# Altium PCB AccelPCB.PcbDoc
Units mil, origin at the board's own origin, x right, y up, seen from the top; angles counter-clockwise.
Board outline 1015.28 x 1540.68 mil, 2 copper layers (Top Layer, Bottom Layer), stack 62.8 mil thick; 7 components, 8 nets, 34 pads, 0 vias.
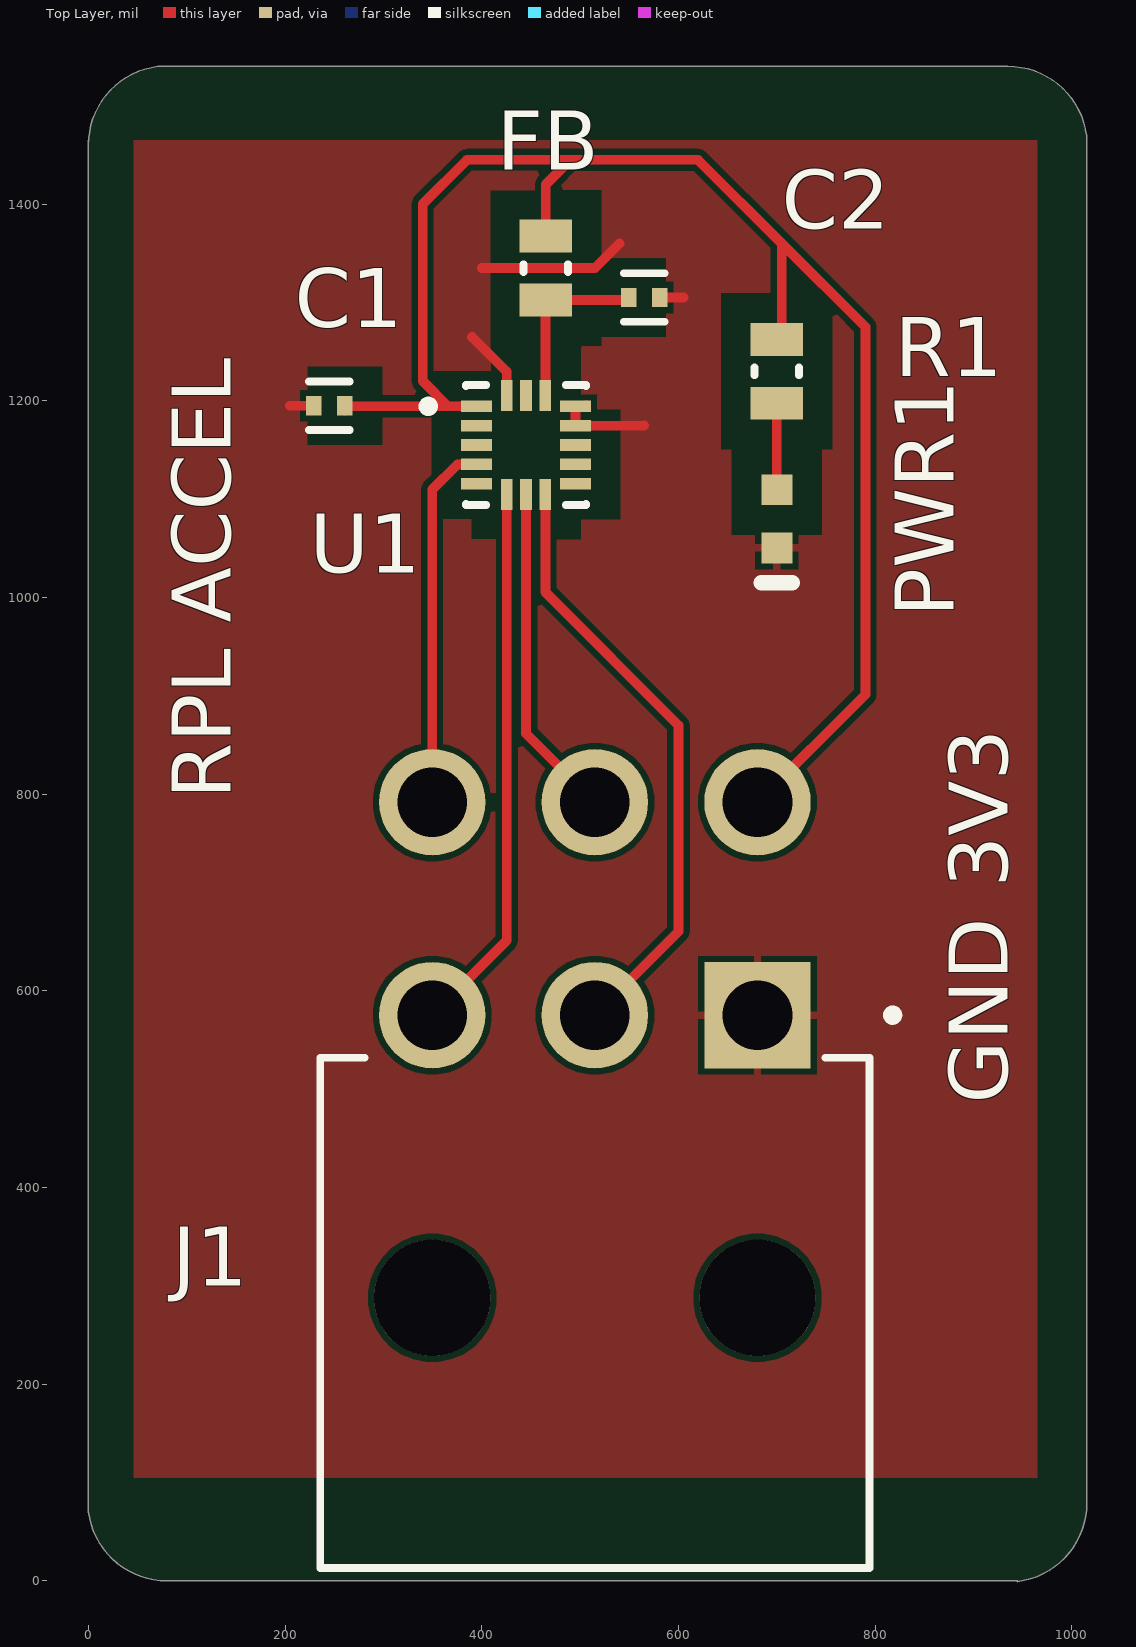
[diagram p0: Top Layer view]
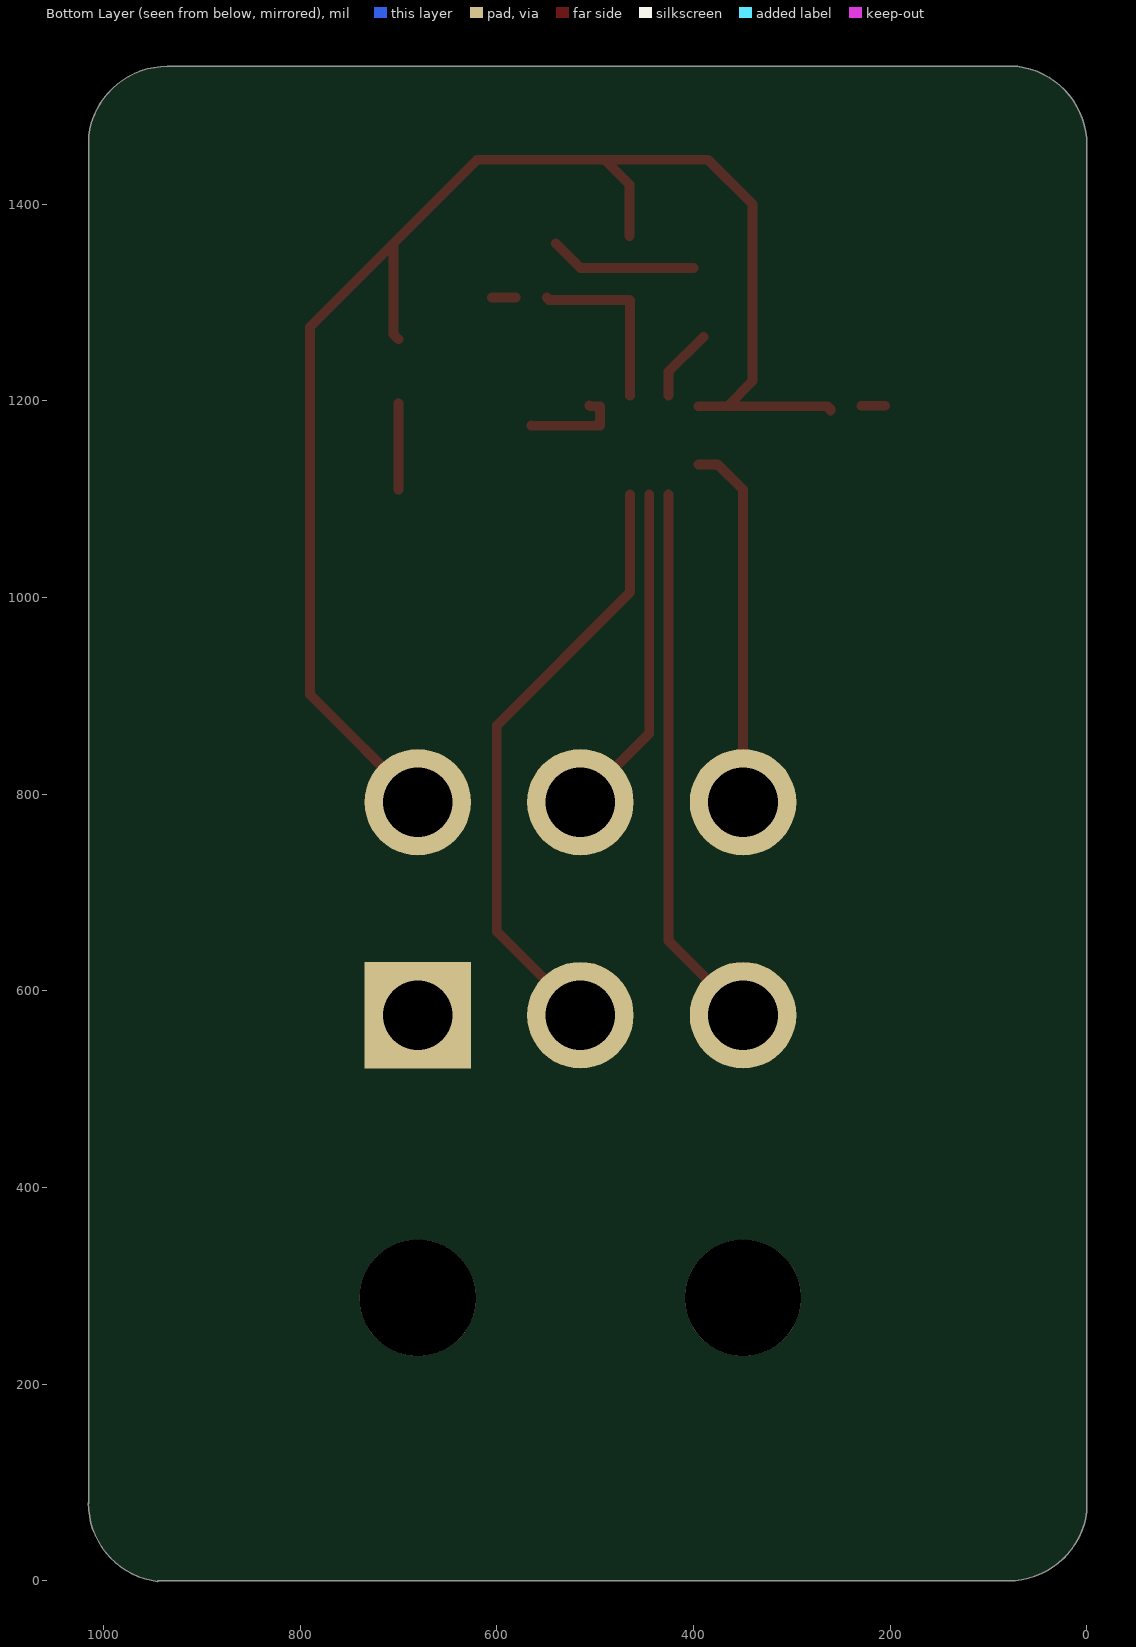
[diagram p1: Bottom Layer view, seen from below]
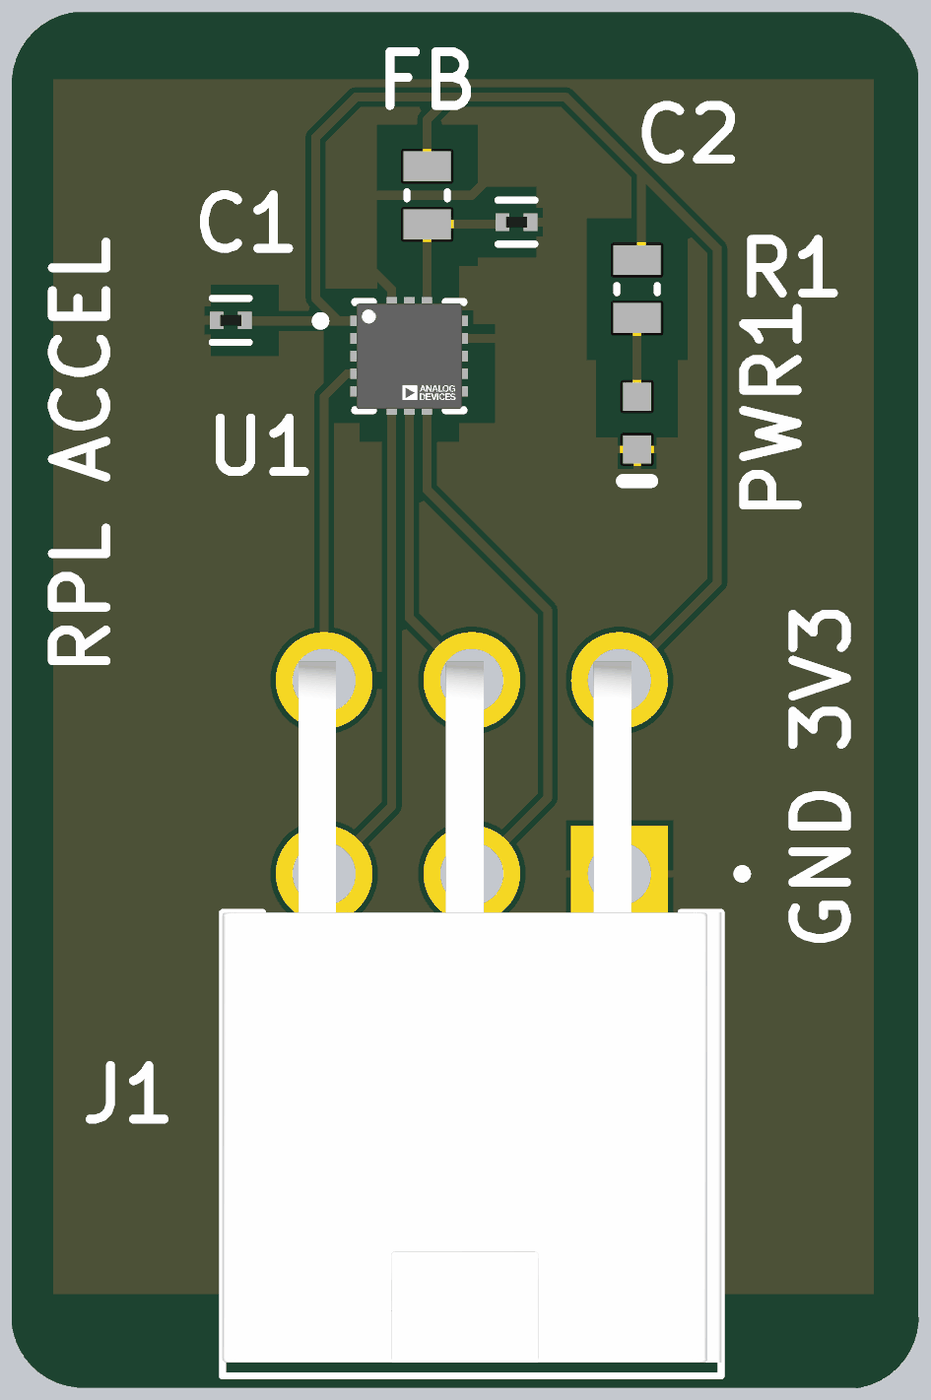
[diagram p2: 3D render of the assembled board from above, using the file's embedded part models]

## Layer stack, top to bottom
Top Solder: solder mask 1, Solder Resist, Dk 3.5
Top Layer: signal copper 1.4
Dielectric 1: dielectric 60, FR-4, Dk 4.5
Bottom Layer: signal copper 1.4
Bottom Solder: solder mask 1, Solder Resist, Dk 3.5

## Board outline
0,70.62 0,1465 0,1460 cw(c80.62,1460) 70.62,1540 935,1540 cw(c935,1459.38) 1015,1469.38 1015,1470 1015,78.69 1015.28,79.32 cw(c934.65,79.32) 944.65,-0.68 945,0 80,0 cw(c80,80.62)

## Design rules (kind name [scope] priority, off if disabled: settings)
BoardOutlineClearance [All] p1: gap=15 ignorepadtopadclearanceinfootprint=FALSE
Clearance [All] p1: gap=6 ignorepadtopadclearanceinfootprint=FALSE except(0: Arc-Hole Track-Hole SMDPad-Hole THPad-Hole Via-Hole Fill-Hole Poly-Hole Region-Hole Text-Hole; 30: SMDPad-Fill SMDPad-Poly SMDPad-Region)
DiffPairsRouting [All] p1: maxlimit=393.7 minlimit=6 mostfreqgap=8 toplayer_minwidth=6 toplayer_maxwidth=15 toplayer_prefwidth=8 bottomlayer_minwidth=6 bottomlayer_maxwidth=15 bottomlayer_prefwidth=8 maxuncoupledlength=500
HoleSize [All] p1: absolutevalues=TRUE maxlimit=250 minlimit=10 maxpercent=80.000 minpercent=20.000
HoleToHoleClearance [All] p1: gap=10 allowstackedmicrovias=FALSE
MinimumAnnularRing [All] p1: minimumring=5
MinimumSolderMaskSliver [All] p1: minsoldermaskwidth=4
PlaneClearance [All] p1: clearance=10
PlaneConnect [All] p1: planeconnectstyle=Direct reliefexpansion=16 reliefentries=4 reliefconductorwidth=6 reliefairgap=6
PolygonConnect [All] p1: connectstyle=Relief reliefconductorwidth=8 reliefentries=4 polygonreliefangle="90 Angle" airgapwidth=6
RoutingCorners [All] p1: cornerstyle=45-Degree minsetback=49.21 maxsetback=49.21
RoutingVias [All] p1: holewidth=12 width=22 viastyle="Through Hole" minholewidth=10 minwidth=20 maxholewidth=250 maxwidth=260
SilkToSilkClearance [All] p1: silktosilkclearance=0
SilkToSolderMaskClearance [IsPad] p1: minsilkscreentomaskgap=2 clearancetoexposedcopper=FALSE
SolderMaskExpansion [All] p1: expansion=2.95 istentingtop=FALSE
Width [All] p1: maxlimit=400 minlimit=6 preferedwidth=8
21 further rules are at their usual default settings.

## Components (designator, comment, footprint, x,y, rotation, side; value= is the part's Value field where it differs from the comment)
C1 "0.1uF 0402" FP-GRM15-MFG 245,1195 r0 top value=0.10μF
C2 "0.1uF 0402" FP-GRM15-MFG 565,1305 r180 top value=0.10μF
FB "100R 0805" RESC2013X50X30LL20T20 465,1335 r90 top
J1 "39-30-0060" FP-39-30-0060-MFG 515,280 r0 top
PWR1 "LTST-S270KGKT" AVAG-HSMX-C190_V 700,1080 r270 top
R1 "75R 0805" RESC2013X50X30LL20T20 700,1230 r270 top
U1 "ADXL373" FP-CC-16-3-MFG 445,1155 r0 top

## Footprints (in the part's own frame and the unit in brackets; to place one, negate y for a bottom-side part, rotate by r counter-clockwise, add the part's x,y. Pads: shape width x height; smd on the part's side, far side on the other; paste and mask are expansions set on the pad)
AVAG-HSMX-C190_V [mm] "SMD, 2-Leads, Body 1.6x0.8mm, Height 0.9mm"
  rect 0.8x0.8 smd: 1(-0.75,0) 2(0.75,0)
  silkscreen extent 1.65,-0.4 1.65,0.4, body extent -0.8,-0.4 0.8,0.4, height 0.9
FP-39-30-0060-MFG [mm]
  rect 2.75x2.75 hole 1.8 paste-1000 mask+0: 1(4.2,7.5)
  round 2.75 hole 1.8 paste-1000 mask+0: 2(0,7.5) 3(-4.2,7.5) 4(4.2,13) 5(0,13) 6(-4.2,13)
  round 3 hole 3 unplated paste-1000 mask+0: ""(-4.2,0.2) ""(4.2,0.2)
  silkscreen extent -7.09,-6.78 7.82,7.62, body extent -7.19,-6.88 7.19,14.48, height 0.25
FP-CC-16-3-MFG [mm]
  rect 0.8x0.3 smd paste+0 mask+0: 1(-1.275,1) 2(-1.275,0.5) 3(-1.275,0) 4(-1.275,-0.5) 5(-1.275,-1) 9(1.275,-1) 10(1.275,-0.5) 11(1.275,0) 12(1.275,0.5) 13(1.275,1)
  rect 0.3x0.8 smd paste+0 mask+0: 6(-0.5,-1.275) 7(0,-1.275) 8(0.5,-1.275) 14(0.5,1.275) 15(0,1.275) 16(-0.5,1.275)
  silkscreen extent -2.65,-1.55 1.55,1.55, body extent -2.17,-2.17 2.17,2.17, height 0.25
FP-GRM15-MFG [mm]
  rect 0.4x0.5 smd paste+0 mask+0: 1(-0.4,0) 2(0.4,0)
  silkscreen extent -0.53,-0.63 0.53,0.63, body extent -0.7,-0.38 0.7,0.38, height 0.25
RESC2013X50X30LL20T20 [mm] "Chip Resistor, 2-Leads, Body 2.00x1.25mm, IPC High Density"
  rect 0.85x1.35 smd: 1(-0.825,0) 2(0.825,0)
  silkscreen extent -0.1,-0.58 0.1,0.58, body extent -1.1,-0.72 1.1,0.72, height 0.5

## Part data
C1 C2: library part CMP-2100-03641-2, "CAP CER 0.1UF 16V X7R 0402", Capacitance=0.10μF, Manufacturer=Murata, Manufacturer Part Number=GRM155R71C104KA88D, Package=GRM15, Temperature="-55°C to +125°C", Temperature Characteristic=X7R, Temperature Range High=+125°C, Temperature Range Low=-55°C, Tolerance=10%, Voltage Rating=16Vdc, Category=Cap, ComponentLink2Description=Datasheet, ComponentLink2URL=https://search.murata.co.jp/Ceramy/image/img/A01X/G101/ENG/GRM155R71H471KA01-01A.pdf, Device Class L1="Passive Components", Device Class L2=Capacitors, Device Class L3="Ceramic Capacitors", Digikey Description="CAP CER 0.1UF 16V X7R 0402", Height=0.55mm, Ipc Land Pattern Name=CAPC10050X219, Lead Free=yes, Material=Ceramic, Mouser Description="0402 0.1 uF 16V ±10 % Tolerance X7R SMT Multilayer Ceramic Capacitor", Octopart=https://octopart.com/grm155r71c104ka88d-murata-196880, RoHS=TRUE, Standoff Height=0mm
FB R1: library part CMP-2001-04896-1, Manufacturer="Vishay Dale", Part Number=CRCW08050000Z0EA
J1: library part CMP-04776-000273-1, "CONN HEADER R/A 6POS 4.2MM", Contact Resistance=10mR, Current Rating=13A, Flammability Rating="UL94 V-0", Housing Color=Natural, Insulation Resistance=1GR, Manufacturer Series=5569, Max Operating Temperature=105°C, Max Voltage Rating (AC)=600V, Min Operating Temperature=-40°C, Contact Finish - Mating="TIN (200) OVER COPPER", Contact Finish - Termination="TIN (200) OVER COPPER", Contact Gender=Male, Contact Material=Brass, Contact Plating=Tin, Contact Type="Male Pin", Depth=19.4mm, DIN Conformance=No, ELV=Compliant, Empty Shell=No, Fastening Type=Ramp, Filter Feature=No, Gender=Male, Glow Wire Compliant=Non-compliant, Halogen Free="Low Halogen", Housing Material=Polyamide, IEC Conformance=No, Lead Free="Lead Free", Material=Nylon, Mating Information="MULTIPLE MATING PARTS AVAILABLE", MIL Conformance=No, Mixed Contacts=No, Mount="Through Hole", Number of Circuits=6, Number of Contacts=6, Number of Ports=1, Number of Positions=6, Number of Rows=2, Option="General Purpose", Orientation="Right Angle", Packaging=Bag, Pitch=4.2mm, Radiation Hardening=No, Row Spacing=0.165inch, Series="Mini-Fit® Jr™ 5569", Shell Material=POLYAMIDE66, Termination=Solder, Voltage Rating=600V, Voltage Rating (DC)=600V
PWR1: library part CMP-1744-00003-1, "LED Uni-Color Yellow, 65 mW, 20 mA, -40 to 85 degC, 2-Pin SMD, RoHS, Tape and Reel", Case Code (Imperial)=0603, Case Code (Metric)=1608, Max Operating Temperature="155 degC", Min Operating Temperature="-55 degC", Package Quantity=5000, Power Rating="100 mW", Resistance="390 Ohm", Tolerance=1%, Voltage Rating="50 V", Case\Package=0603, ComponentLink1Description="Manufacturer URL", ComponentLink1URL=http://www.avagotech.com/, ComponentLink2Description=Datasheet, ComponentLink2URL=http://docs.avagotech.com/docs/AV02-0551EN, ComponentLink3Description="Package Specification", ComponentLink3URL=http://www.fairchildsemi.com/dwg/MA/MA03D.pdf, DatasheetVersion=Mar-12, Height="0.45 mm", Length="1.6 mm", Mount="Surface Mount", PackageDescription="2-Pin Surface Mount Device, Body 1.6 x 0.8 mm, Height 0.9 mm", PackageReference=HSMX-C190, Packaging="Tape and Reel", Pins=2, REACH SVHC="No SVHC", RoHSCompliant=true, Voltage Rating (DC)="50 V", Width="0.8 mm"
U1: library part Component_1

## Nets (pads, with @x,y where several pads share a name; then routed paths per layer and width w, separated by ;. In a path a pad name is that pad's centre, name@x,y a point inside that pad or via, vN(x,y) a via of type N, cw(c..) or ccw(c..) an arc to the next point about the centre after c; other vN are vias at no path point)
CS: J1.2 U1.8 | length 620.8
  Top Layer w10: U1.8 464.68,1005.32 600,870 600,660.28 J1.2
GND: C1.1 C2.1 J1.1 PWR1.2 U1.12 U1.13 U1.16 | length 374
  Top Layer w10: 205,1195 C1.1 ; 390,1265 425.32,1229.68 U1.16 ; 400,1335 515,1335 540,1360 ; U1.13@505.94,1195.28 505.04,1194.37 U1.13 U1.12 564.68,1174.68 565,1175 ; C2.1 605,1305
MISO: J1.5 U1.7 | length 342
  Top Layer w10: U1.7 445,861.81 J1.5
MOSI: J1.3 U1.6 | length 560.9
  Top Layer w10: J1.3 425.32,650.94 U1.6
NetC2_2: C2.2 FB.1 U1.14 | length 182.7
  Top Layer w10: U1.14 464.68,1302.2 FB.1 546.77,1302.52 C2.2
NetPWR1_1: PWR1.1 R1.2 | length 88
  Top Layer w10: PWR1.1 R1.2
SCLK: J1.6 U1.4 | length 373.6
  Top Layer w10: J1.6 349.65,1109.65 375.32,1135.32 U1.4
VDD: C1.2 FB.2 J1.4 R1.1 U1.1 | length 1608.1
  Top Layer w10: C1.2@260.75,1190 260.75,1191.5 263.62,1194.37 365.63,1194.37 ; U1.1 365.63,1194.37 ; FB.2 465,1420 490,1445 ; J1.4 790,901.46 790,1275 705,1360 ; R1.1 705,1267.48 705,1360 ; 365.63,1194.37 340,1220 340,1400 385,1445 490,1445 ; 490,1445 620,1445 705,1360
pads on no net: J1. U1.2 U1.3 U1.5 U1.9 U1.10 U1.11 U1.15

## Polygon pours and split planes (outlines as drawn)
GND on Top Layer "GNDTOP" (solid, pour order 0): 46,1465 965,1465 965,105 46,105

## Silkscreen, mask and mechanical layers (free items; w line width, h text height)
Top Overlay:
  text "RPL ACCEL" at 145,795 h60 r90
  text "3V3" at 935,705 h60 r90
  text "GND" at 935,485 h60 r90
Mechanical 1:
  lines w10: 0,70 0,1465 ; 0,70.62 ccw(c80,80.62) 80,0 945,0 ; 0,1460 cw(c80.62,1460) 70.62,1540 935,1540 cw(c935,1459.38) 1015,1469.38 ; 944.65,-0.68 ccw(c934.65,79.32) 1015.28,79.32 ; 1015,78.69 1015,1470